# Altium PCB Vector_Mini_ST.PcbDoc (part 2 of 2)
Units mm, origin at the board's own origin, x right, y up, seen from the top; angles counter-clockwise.
Board outline 50 x 50 mm, 4 copper layers (Top Layer, Gnd, Power, Bottom Layer), stack 1.01 mm thick; 146 components, 103 nets, 533 pads, 310 vias.
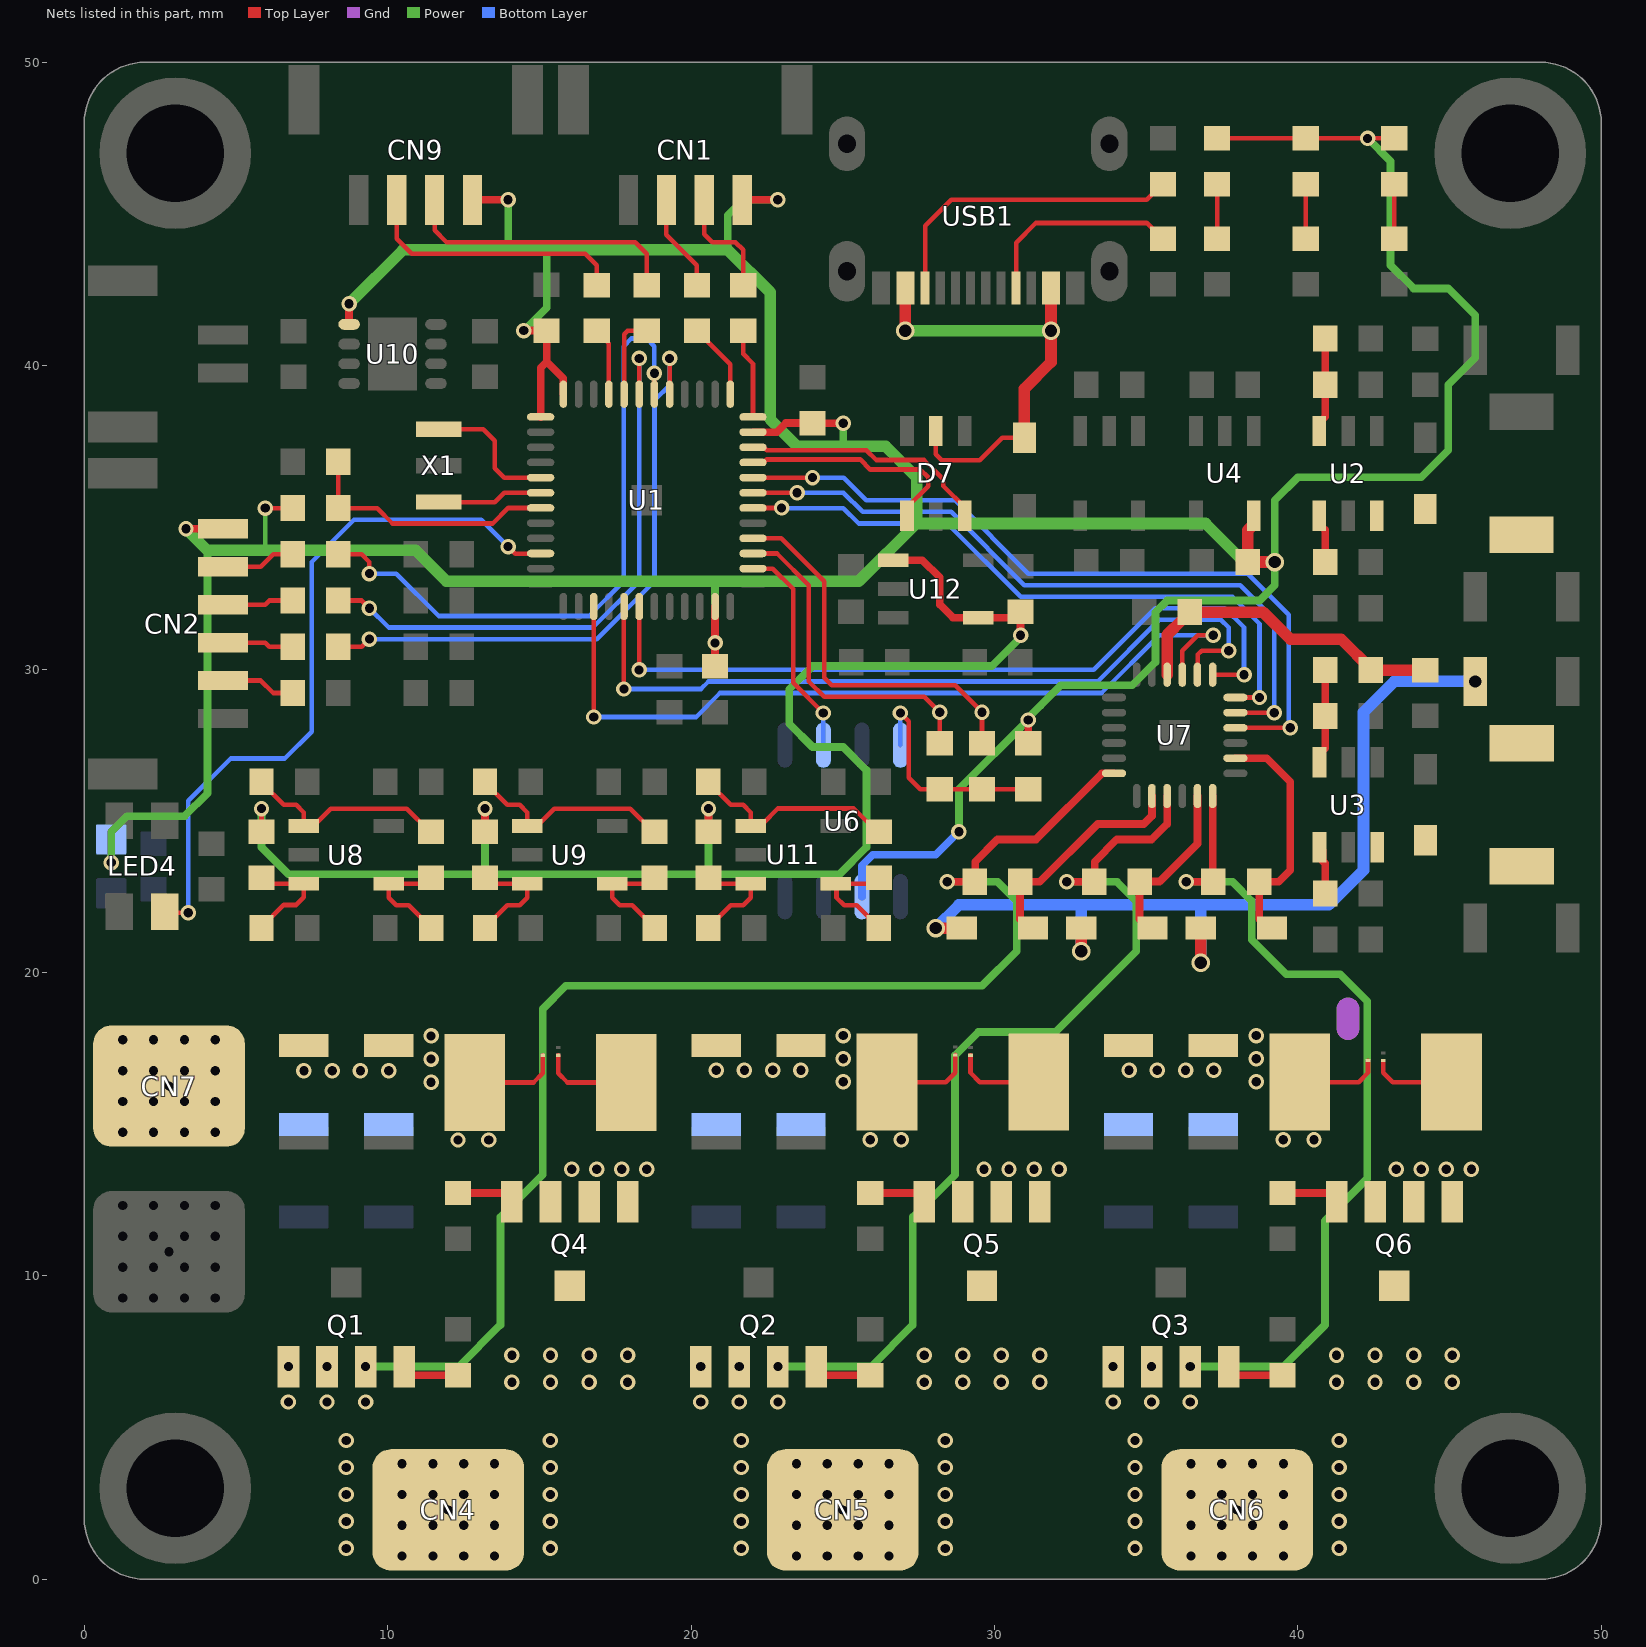
[diagram p4: the nets of this part, all layers, seen from the top]

## Via types
v1: diameter 0.508, hole 0.305, Top Layer to Bottom Layer, tented both sides, 297 vias
v2: diameter 0.61, hole 0.406, Top Layer to Bottom Layer, tented both sides, 12 vias
v3: diameter 1.5, hole 1, Top Layer to Bottom Layer, tented both sides, 1 vias

## Nets (pads, with @x,y where several pads share a name; then routed paths per layer and width w, separated by ;. In a path a pad name is that pad's centre, name@x,y a point inside that pad or via, vN(x,y) a via of type N, cw(c..) or ccw(c..) an arc to the next point about the centre after c; other vN are vias at no path point) (continued)
NetCN1_2: CN1.2 R11.2 | length 3.2
  Top Layer w0.152: CN1.2@19.187,45.466 19.187,44.313 20.193,43.307 R11.2@20.193,42.656
NetCN1_3: CN1.3 R12.2 | length 3.8
  Top Layer w0.152: CN1.3@20.437,45.466 20.437,44.333 20.701,44.069 21.463,44.069 21.717,43.815 R12.2@21.717,42.656
NetCN2_2: CN2.2 R13.2 | length 2.5
  Top Layer w0.152: CN2.2@4.572,29.621 5.812,29.621 6.223,29.21 R13.2@6.866,29.21
NetCN2_3: CN2.3 R14.2 | length 2.4
  Top Layer w0.152: CN2.3@4.572,30.871 5.959,30.871 6.096,30.734 R14.2@6.866,30.734
NetCN2_4: CN2.4 R15.2 | length 2.4
  Top Layer w0.152: CN2.4@4.572,32.121 5.959,32.121 6.096,32.258 R15.2@6.866,32.258
NetCN2_5: CN2.5 R16.2 | length 2.5
  Top Layer w0.152: CN2.5@4.572,33.371 5.812,33.371 6.223,33.782 R16.2@6.866,33.782
NetCN9_2: CN9.2 R46.2 | length 8.9
  Top Layer w0.152: CN9.2@10.297,45.466 10.297,44.186 10.795,43.688 16.51,43.688 16.891,43.307 R46.2@16.891,42.656
NetCN9_3: CN9.3 R49.2 | length 9.4
  Top Layer w0.152: CN9.3@11.547,45.466 11.547,44.46 11.938,44.069 18.161,44.069 18.542,43.688 R49.2@18.542,42.656
NetD1_1: D1.1 L1.1 U2.6
NetD2_1: D2.1 L2.1 U3.6
NetLED1_2: LED1.2 R7.1 | length 1.8
  Top Layer w0.152: R7.1@37.338,44.188 LED1.2@37.338,45.982
NetLED2_2: LED2.2 R8.1 | length 1.8
  Top Layer w0.152: R8.1@40.259,44.188 LED2.2@40.259,45.982
NetLED3_2: LED3.2 R9.1 | length 1.8
  Top Layer w0.152: R9.1@43.18,44.188 LED3.2@43.18,45.982
NetNT2_2: NT2.2 Q4.1 R26.2 | length 3
  Top Layer w0.152: NT2.2@15.621,17.272 15.621,16.678 15.927,16.372 R26.2@17.867,16.372
  other v1: 16.066,13.516 16.891,13.516 17.716,13.516 18.542,13.516
NetNT3_2: NT3.2 Q5.1 R27.2 | length 3
  Top Layer w0.152: NT3.2@29.21,17.272 29.21,16.689 29.516,16.383 R27.2@31.456,16.383
  other v1: 29.654,13.516 30.48,13.516 31.305,13.516 32.131,13.516
NetNT4_2: NT4.2 Q6.1 R28.2 | length 2.7
  Top Layer w0.152: 42.819,17.029 42.819,16.689 43.125,16.383 R28.2@45.065,16.383
  other v1: 43.243,13.516 44.069,13.516 44.895,13.516 45.72,13.516
NetQ1_2: Q1.2 R20.2 | length 1.9
  Top Layer w0.254: Q1.2@10.541,7.009 10.541,6.954 10.769,6.726 R20.2@12.319,6.726
NetQ2_2: Q2.2 R21.2 | length 1.9
  Top Layer w0.254: Q2.2@24.13,7.009 24.13,6.954 24.358,6.726 R21.2@25.908,6.726
NetQ3_2: Q3.2 R22.2 | length 1.9
  Top Layer w0.254: Q3.2@37.719,7.009 37.719,6.954 37.947,6.726 R22.2@39.497,6.726
NetQ4_2: Q4.2 R23.2 | length 1.9
  Top Layer w0.254: R23.2@12.319,12.731 13.869,12.731 14.097,12.503 Q4.2@14.097,12.447
NetQ5_2: Q5.2 R24.2 | length 1.9
  Top Layer w0.254: R24.2@25.908,12.73 27.458,12.73 27.686,12.502 Q5.2@27.686,12.447
NetQ6_2: Q6.2 R25.2 | length 1.9
  Top Layer w0.254: R25.2@39.497,12.73 41.047,12.73 41.275,12.502 Q6.2@41.275,12.447
NetR1_1: R1.1 R5.2 U2.3 | length 3.1
  Top Layer w0.254: U2.3@40.706,37.846 40.706,38.121 40.902,38.317 R5.2@40.902,39.37 R1.1@40.902,40.894
NetR2_1: R2.1 R6.2 U3.3 | length 3.1
  Top Layer w0.254: U3.3@40.714,26.924 40.714,27.199 40.902,27.387 R6.2@40.902,28.448 R2.1@40.902,29.972
NetR3_2: R3.2 U2.4 | length 1.6
  Top Layer w0.254: U2.4@40.706,35.052 40.706,34.777 40.902,34.581 R3.2@40.902,33.528
NetR4_2: R4.2 U3.4 | length 1.6
  Top Layer w0.254: U3.4@40.714,24.13 40.812,24.032 40.812,23.682 40.902,23.592 R4.2@40.902,22.606
NetR17_2: R17.2 R18.2 R19.1 U6.4 | length 7.4
  Top Layer w0.152: v1(26.901,28.552) 27.178,28.275 27.178,26.416 27.551,26.043 R17.2@28.194,26.043 R18.2@29.591,26.043 R19.1@31.115,26.043
  Bottom Layer w0.152: U6.4@26.901,27.496 v1(26.901,28.552)
NetR29_2: R29.2 USB1.10 | length 10.5
  Top Layer w0.152: USB1.10@27.714,42.561 27.714,44.605 28.575,45.466 35.016,45.466 R29.2@35.531,45.982
  Top Layer w0.254: R29.2@35.531,45.982 R29.2@35.56,45.982
NetR30_1: R30.1 R33.2 U8.4 | length 3.8
  Top Layer w0.152: U8.4@10.033,22.909 10.033,22.465 10.287,22.211 10.697,22.211 R33.2@11.43,21.477 ; U8.4@10.036,22.926 11.234,22.926 R30.1@11.43,23.122 ; R33.2@11.43,21.492 R33.2@11.459,21.463
NetR30_2: R30.2 R35.1 U8.1 | length 7
  Top Layer w0.152: R35.1@5.842,26.26 6.575,25.527 6.985,25.527 7.239,25.273 U8.1@7.239,24.829 ; U8.1@7.334,24.924 7.652,24.924 8.128,25.4 10.632,25.4 R30.2@11.401,24.63
  Top Layer w0.254: R35.1@5.842,26.26 R35.1@5.842,26.289 ; U8.1@7.239,24.829 U8.1@7.236,24.826 U8.1@7.334,24.924 ; R30.2@11.401,24.63 R30.2@11.43,24.63
NetR31_1: R31.1 R34.2 U9.4 | length 3.8
  Top Layer w0.152: U9.4@17.399,22.909 17.399,22.465 17.653,22.211 18.063,22.211 R34.2@18.796,21.477 ; U9.4@17.402,22.926 18.6,22.926 R31.1@18.796,23.122 ; R34.2@18.796,21.492 R34.2@18.825,21.463
NetR31_2: R31.2 R36.1 U9.1 | length 7
  Top Layer w0.152: R36.1@13.208,26.289 13.208,26.26 13.941,25.527 14.351,25.527 14.605,25.273 14.605,24.829 U9.1@14.602,24.826 14.7,24.924 15.018,24.924 15.494,25.4 17.998,25.4 18.767,24.63 R31.2@18.796,24.63
NetR37_2: R37.2 R41.2 U8.3 | length 3.8
  Top Layer w0.152: R37.2@5.842,21.463 5.842,21.492 6.575,22.225 6.985,22.225 7.239,22.479 7.239,22.923 U8.3@7.236,22.926 6.038,22.926 R41.2@5.842,23.122
NetR38_2: R38.2 R42.2 U9.3 | length 3.7
  Top Layer w0.152: R42.2@13.179,23.093 13.346,22.926 U9.3@14.602,22.926 ; R38.2@13.208,21.477 13.941,22.211 14.351,22.211 14.605,22.465 U9.3@14.605,22.909
NetR39_2: R39.2 USB1.4 | length 6.8
  Top Layer w0.152: USB1.4@30.714,42.561 30.714,44.049 31.369,44.704 35.016,44.704 35.531,44.188 R39.2@35.56,44.188
NetR43_1: R43.1 R44.2 U11.4 | length 3.8
  Top Layer w0.152: U11.4@24.768,22.926 25.995,22.926 R43.1@26.191,23.122 ; U11.4@24.794,22.909 24.794,22.465 25.048,22.211 25.458,22.211 R44.2@26.191,21.477
NetR43_2: R43.2 R47.1 U11.1 | length 7
  Top Layer w0.152: R47.1@20.574,26.289 20.574,26.26 21.307,25.527 21.717,25.527 21.971,25.273 U11.1@21.971,24.829 ; U11.1@21.968,24.826 U11.1@21.971,24.829 ; R43.2@26.133,24.63 R43.2@26.162,24.63 ; R43.2@26.136,24.633 25.367,25.403 22.863,25.403 22.384,24.924 22.066,24.924 U11.1@21.971,24.829
NetR48_2: R48.2 R50.2 U11.3 | length 3.7
  Top Layer w0.152: R48.2@20.574,21.477 21.307,22.211 21.717,22.211 21.971,22.465 U11.3@21.971,22.909 ; R50.2@20.574,23.122 20.77,22.926 U11.3@21.968,22.926
NRST: C18.2 R10.1 U1.7 | length 8.6
  Top Layer w0.152: C18.2@8.374,36.83 R10.1@8.374,35.306 9.652,35.306 10.16,34.798 13.462,34.798 13.974,35.31 U1.7@15.042,35.31
OSC_IN: U1.5 X1.3 | length 4.5
  Top Layer w0.152: X1.3@11.684,37.903 13.151,37.903 13.532,37.522 13.532,36.617 13.839,36.31 U1.5@15.042,36.31
OSC_OUT: U1.6 X1.1 | length 3.5
  Top Layer w0.152: X1.1@11.684,35.503 13.532,35.503 13.839,35.81 U1.6@15.042,35.81
PGND: C22.2 C23.2 C24.2 C25.2 C26.2 C27.2 C29.2 C30.2 C31.2 C32.2 C33.2 C34.2 CN7.1 NT1.2 NT5.2 NT6.2 NT7.2 R26.1 R27.1 R28.1 | length 9.3
  Top Layer w0.152: R26.1@12.867,16.372 14.807,16.372 15.113,16.678 NT5.2@15.113,17.272 ; R27.1@26.456,16.383 28.396,16.383 28.702,16.689 NT6.2@28.702,17.283 ; R28.1@40.065,16.383 42.005,16.383 42.311,16.689 NT7.2@42.311,17.093
  Gnd w0.762: 41.656,18.161 NT1.2@41.656,18.796
  other v1: 12.319,14.478 13.335,14.478 25.908,14.489 26.924,14.489 39.517,14.489 40.533,14.489 11.43,16.383 25.019,16.394 38.628,16.394 7.239,16.764 8.17,16.764 9.102,16.764 10.033,16.764 20.828,16.775 21.759,16.775 22.691,16.775 23.622,16.775 34.437,16.775 35.368,16.775 36.3,16.775 37.231,16.775 11.43,17.145 25.019,17.156 38.628,17.156 11.43,17.907 25.019,17.918 38.628,17.918
PWM_AH: U1.30 U7.24 | length 21.5
  Top Layer w0.152: U1.30@22.042,35.31 v1(22.983,35.31) ; U7.24@37.941,29.063 v1(38.735,29.063)
  Bottom Layer w0.152: v1(22.983,35.31) 22.987,35.306 25.019,35.306 25.527,34.798 28.448,34.798 30.861,32.385 37.846,32.385 38.735,31.496 v1(38.735,29.063)
PWM_AL: U1.15 U7.3 | length 27.2
  Top Layer w0.152: v1(16.792,28.42) U1.15@16.792,32.06 ; U7.3@36.191,29.813 36.191,30.603 36.703,31.115 v1(37.211,31.115)
  Bottom Layer w0.152: v1(16.792,28.42) 20.165,28.42 20.955,29.21 33.528,29.21 35.433,31.115 v1(37.211,31.115)
PWM_BH: U1.31 U7.23 | length 23.3
  Top Layer w0.152: U1.31@22.042,35.81 v1(23.495,35.81) ; U7.23@37.941,28.563 v1(39.223,28.563)
  Bottom Layer w0.152: v1(23.495,35.81) 25.023,35.81 25.654,35.179 28.575,35.179 30.988,32.766 38.1,32.766 39.223,31.643 v1(39.223,28.563)
PWM_BL: U1.17 U7.2 | length 26.2
  Top Layer w0.152: v1(17.786,29.343) 17.786,32.054 U1.17@17.792,32.06 ; U7.2@36.691,29.813 36.703,29.825 36.703,30.48 36.83,30.607 v1(37.719,30.607)
  Bottom Layer w0.152: v1(17.786,29.343) 20.326,29.343 20.574,29.591 33.401,29.591 35.433,31.623 37.465,31.623 37.719,31.369 v1(37.719,30.607)
PWM_CH: U1.32 U7.22 | length 25.1
  Top Layer w0.152: U1.32@22.042,36.31 v1(24.003,36.31) ; U7.22@37.941,28.063 37.943,28.065 v1(39.749,28.065)
  Bottom Layer w0.152: v1(24.003,36.31) 25.031,36.31 25.781,35.56 28.702,35.56 31.115,33.147 38.354,33.147 39.706,31.795 39.706,28.108 v1(39.749,28.065)
PWM_CL: U1.18 U7.1 | length 25.7
  Top Layer w0.152: v1(18.288,29.972) 18.29,29.974 18.29,32.058 U1.18@18.292,32.06 ; U7.1@37.191,29.813 v1(38.227,29.813)
  Bottom Layer w0.152: v1(18.288,29.972) 33.274,29.972 35.306,32.004 37.592,32.004 38.227,31.369 v1(38.227,29.813)
RGB_TIM: LED4.2 U1.10 | length 23.7
  Top Layer w0.152: LED4.2@2.655,21.995 2.679,21.971 v1(3.429,21.971) ; v1(13.97,34.036) 14.21,33.796 15.028,33.796 U1.10@15.042,33.81
  Bottom Layer w0.152: v1(3.429,21.971) 3.429,25.654 4.826,27.051 6.604,27.051 7.493,27.94 7.493,33.528 8.89,34.925 13.081,34.925 v1(13.97,34.036)
SH_A: C20.1 CN4.1 Q1.1 Q4.3 U7.12 | length 44
  Top Layer w0.254: v1(28.448,22.987) C20.1@29.345,22.987 29.366,23.008 29.366,23.651 30.099,24.384 31.369,24.384 33.548,26.563 U7.12@33.941,26.563
  Power w0.254: v1(9.272,7.009) 12.343,7.009 13.716,8.382 13.716,11.938 15.113,13.335 15.113,18.796 15.875,19.558 29.591,19.558 30.734,20.701 30.734,22.352 30.099,22.987 v1(28.448,22.987)
  other v1: 8.636,1.016 15.364,1.016 8.636,1.905 15.364,1.905 8.636,2.794 15.364,2.794 8.636,3.683 15.364,3.683 8.636,4.572 15.364,4.572 6.73,5.842 8.001,5.842 9.272,5.842 14.095,6.495 15.366,6.495 16.638,6.495 17.909,6.495 6.73,7.009 8.001,7.009 14.095,7.38 15.366,7.38 16.638,7.38 17.909,7.38
SH_B: C21.1 CN5.1 Q2.1 Q5.3 U7.15 | length 31.5
  Top Layer w0.254: v1(32.385,22.987) C21.1@33.282,22.987 33.303,23.008 33.303,23.651 34.036,24.384 35.179,24.384 35.691,24.896 U7.15@35.691,25.813
  Power w0.254: v1(22.863,7.009) 25.933,7.009 27.306,8.382 27.306,11.938 ; 27.305,11.938 28.702,13.335 28.702,17.272 29.464,18.034 32.004,18.034 34.671,20.701 34.671,22.352 34.036,22.987 v1(32.385,22.987)
  other v1: 21.654,1.016 28.382,1.016 21.654,1.905 28.382,1.905 21.654,2.794 28.382,2.794 21.654,3.683 28.382,3.683 21.654,4.572 28.382,4.572 20.32,5.842 21.591,5.842 22.863,5.842 27.684,6.495 28.955,6.495 30.227,6.495 31.498,6.495 20.32,7.009 21.591,7.009 27.684,7.38 28.955,7.38 30.227,7.38 31.498,7.38
SH_C: C28.1 CN6.1 Q3.1 Q6.3 U7.18 | length 28.3
  Top Layer w0.254: v1(36.322,22.987) C28.1@37.219,22.987 37.191,23.015 U7.18@37.191,25.813
  Power w0.254: v1(36.322,22.987) 37.846,22.987 38.481,22.352 38.481,21.082 39.624,19.939 41.402,19.939 42.291,19.05 42.291,13.208 40.894,11.811 40.894,8.381 39.522,7.009 v1(36.452,7.009)
  other v1: 34.632,1.016 41.36,1.016 34.632,1.905 41.36,1.905 34.632,2.794 41.36,2.794 34.632,3.683 41.36,3.683 34.632,4.572 41.36,4.572 33.909,5.842 35.18,5.842 36.452,5.842 41.273,6.495 42.544,6.495 43.816,6.495 45.087,6.495 33.909,7.009 35.18,7.009 41.273,7.38 42.544,7.38 43.816,7.38 45.087,7.38
SPI1_MISO: R16.1 U1.42 | length 21.5
  Top Layer w0.152: R16.1@8.374,33.782 9.144,33.782 9.398,33.528 v1(9.398,33.147) ; U1.42@18.792,39.06 v1(18.792,39.751)
  Bottom Layer w0.152: v1(9.398,33.147) 10.287,33.147 11.684,31.75 16.637,31.75 17.78,32.893 17.78,40.64 18.034,40.894 18.542,40.894 18.792,40.644 v1(18.792,39.751)
SPI1_MOSI: R15.1 U1.43 | length 19.4
  Top Layer w0.152: R15.1@8.374,32.258 9.144,32.258 v1(9.398,32.004) ; U1.43@18.292,39.06 v1(18.292,40.239)
  Bottom Layer w0.152: v1(9.398,32.004) 10.033,31.369 16.764,31.369 18.292,32.897 v1(18.292,40.239)
SPI1_SCK: R14.1 U1.41 | length 20
  Top Layer w0.152: R14.1@8.374,30.734 9.144,30.734 v1(9.398,30.988) ; U1.41@19.292,39.06 v1(19.292,40.239)
  Bottom Layer w0.152: v1(9.398,30.988) 16.891,30.988 18.796,32.893 18.796,38.862 19.292,39.358 v1(19.292,40.239)
SPI2_MISO: R17.1 U1.27 | length 11.2
  Top Layer w0.152: U1.27@22.042,33.81 22.832,33.81 23.876,32.766 23.876,29.591 24.384,29.083 27.686,29.083 v1(28.194,28.575) R17.1@28.194,27.551
SPI2_MOSI: R18.1 U1.28 | length 12.8
  Top Layer w0.152: U1.28@22.042,34.31 22.967,34.31 24.384,32.893 24.384,29.718 24.638,29.464 28.702,29.464 v1(29.591,28.575) R18.1@29.591,27.551
SPI2_SCK: U1.26 U6.2 | length 7.2
  Top Layer w0.152: U1.26@22.042,33.31 22.697,33.31 23.368,32.639 23.368,30.988 23.368,29.545 v1(24.361,28.552)
  Bottom Layer w0.152: U6.2@24.361,27.496 v1(24.361,28.552)
SWC: R11.1 U1.37 | length 2.6
  Top Layer w0.152: R11.1@20.193,41.148 20.222,41.148 20.549,40.821 20.549,40.792 21.292,40.049 U1.37@21.292,39.06
SWD: R12.1 U1.36 | length 3
  Top Layer w0.152: R12.1@21.717,41.148 21.717,40.386 22.042,40.061 U1.36@22.042,38.31
Uref_1.65: C42.2 R41.1 R42.1 R50.1 U12.1 U12.4 | length 50.2
  Top Layer w0.152: R41.1@5.842,24.63 v1(5.842,25.4)
  Top Layer w0.254: R42.1@13.208,24.63 v1(13.208,25.4) ; R50.1@20.574,24.63 v1(20.574,25.4) ; U12.1@26.667,33.589 27.625,33.589 28.194,33.02 28.194,32.131 28.636,31.689 U12.4@29.467,31.689 30.665,31.689 C42.2@30.861,31.885 v1(30.861,31.115)
  Power w0.254: v1(5.842,25.4) 5.842,24.13 6.731,23.241 13.208,23.241 ; v1(13.208,25.4) 13.208,23.241 ; v1(20.574,25.4) 20.574,23.241 ; v1(30.861,31.115) 30.861,31.046 29.914,30.099 24.003,30.099 23.241,29.337 23.241,28.194 24.003,27.432 25.019,27.432 25.781,26.67 25.781,24.13 24.892,23.241 20.574,23.241 ; 13.208,23.241 20.574,23.241
USART1_RX: R46.1 U1.45 | length 2.3
  Top Layer w0.152: R46.1@16.891,41.148 16.92,41.148 17.247,40.821 17.247,40.777 17.292,40.732 U1.45@17.292,39.06
USART1_TX: R49.1 U1.44 | length 2.8
  Top Layer w0.152: U1.44@17.792,39.06 17.792,41.033 17.907,41.148 R49.1@18.542,41.148
USB_FS_DM: D7.1 U1.33 | length 7.6
  Top Layer w0.152: U1.33@22.042,36.81 22.393,36.81 22.492,36.909 25.575,36.909 25.908,36.576 27.559,36.576 27.813,36.322 27.813,36.023 27.117,35.327 D7.1@27.117,35.052
USB_FS_DP: D7.3 U1.34 | length 8.2
  Top Layer w0.152: U1.34@22.042,37.31 22.393,37.31 22.492,37.211 25.781,37.211 26.101,36.891 27.678,36.891 28.309,36.259 28.309,36.035 29.017,35.327 D7.3@29.017,35.052
VB_A: C20.2 D3.1 U7.14 | length 7.5
  Top Layer w0.254: C20.2@30.845,22.995 30.845,21.765 D3.1@31.139,21.471 ; C20.2@30.853,22.987 31.496,22.987 33.401,24.892 34.925,24.892 35.191,25.158 U7.14@35.191,25.813
VB_B: C21.2 D4.1 U7.17 | length 5.6
  Top Layer w0.254: D4.1@35.076,21.471 34.782,21.765 34.782,22.995 35.441,22.995 36.691,24.245 U7.17@36.691,25.813
VB_C: C28.2 D5.1 U7.20 | length 8
  Top Layer w0.254: U7.20@37.941,27.063 38.977,27.063 39.751,26.289 39.751,23.368 39.37,22.987 C28.2@38.727,22.987 38.727,21.757 39.021,21.463 D5.1@39.146,21.463 D5.1@39.116,21.493
VCC_3.3: C10.1 C12.1 C13.1 C14.1 CN1.4 CN2.6 CN8.1 CN9.4 LED1.1 LED2.1 LED3.1 R10.2 R19.2 U1.1 U1.23 U1.35 U1.48 U4.5 U6.6 U10.5 | length 156.3
  Top Layer w0.152: v1(5.969,35.306) R10.2@6.866,35.306 ; LED1.1@37.338,47.49 LED2.1@40.259,47.49 v1(42.299,47.49) LED3.1@43.18,47.49
  Top Layer w0.254: v1(3.352,34.621) CN2.6@4.572,34.621 ; U10.5@8.727,41.361 v1(8.727,42.037) ; CN9.4@12.797,45.466 v1(13.97,45.466) ; v1(14.486,41.156) C14.1@15.24,41.156 15.24,40.132 ; U1.1@15.042,38.31 15.042,39.934 15.24,40.132 ; U1.48@15.792,39.06 15.792,39.58 15.24,40.132 ; C12.1@20.792,30.091 v1(20.792,30.861) U1.23@20.792,32.06 ; C12.1@20.828,30.091 C12.1@20.857,30.091 ; CN1.4@21.687,45.466 v1(22.86,45.466) ; U1.35@22.042,37.81 22.824,37.81 23.122,38.108 C13.1@23.876,38.108 ; C13.1@24.003,38.108 24.011,38.1 v1(25.019,38.1) ; R19.2@31.115,27.551 v1(31.115,28.321)
  Top Layer w0.381: U4.5@38.542,35.049 38.542,34.774 38.346,34.578 C10.1@38.346,33.528 v2(39.243,33.528)
  Power w0.152: 5.969,33.909 v1(5.969,35.306)
  Power w0.254: v1(0.889,23.622) 0.889,24.638 1.397,25.146 3.302,25.146 4.064,25.908 4.064,33.909 ; 13.97,43.815 v1(13.97,45.466) ; v1(14.486,41.156) 15.24,41.91 15.24,43.815 ; v1(20.792,30.861) 20.792,32.857 20.828,32.893 ; 21.209,43.815 21.209,44.958 21.717,45.466 v1(22.86,45.466) ; 24.956,37.338 25.019,37.401 v1(25.019,38.1) ; v1(28.829,24.638) 28.829,26.035 v1(31.115,28.321) 31.115,28.39 31.527,28.802 32.189,29.464 34.544,29.464 35.306,30.226 35.306,31.877 35.687,32.258 38.735,32.258 39.243,32.766 v2(39.243,33.528) 39.243,35.56 40.005,36.322 44.069,36.322 44.958,37.211 44.958,39.37 45.847,40.259 45.847,41.656 44.958,42.545 43.815,42.545 43.053,43.307 43.053,46.736 v1(42.299,47.49)
  Power w0.381: v1(3.352,34.621) 4.064,33.909 5.969,33.909 10.922,33.909 11.938,32.893 20.828,32.893 25.527,32.893 27.432,34.798 ; v1(8.727,42.037) 10.505,43.815 13.97,43.815 15.24,43.815 21.209,43.815 22.606,42.418 22.606,38.227 23.495,37.338 24.956,37.338 26.416,37.338 27.432,36.322 27.432,34.798 ; v2(39.243,33.528) 38.227,33.528 36.957,34.798 27.432,34.798
  Bottom Layer w0.254: v1(0.889,23.622) CN8.1@0.889,24.384 ; U6.6@25.631,22.496 25.631,23.518 25.989,23.876 28.067,23.876 v1(28.829,24.638)
VCC_12: C7.1 C8.1 C19.1 D3.2 D4.2 D5.2 L2.2 R2.2 U7.4 | length 41.4
  Top Layer w0.381: v2(28.067,21.463) D3.2@28.926,21.463 ; v2(32.863,20.701) D4.2@32.863,21.463 ; U7.4@35.691,29.813 35.691,31.127 36.199,31.635 36.228,31.635 36.441,31.848 C19.1@36.441,31.877 38.862,31.877 39.751,30.988 41.423,30.988 42.418,29.993 42.418,29.964 C8.1@44.196,29.964 ; v2(36.8,20.32) D5.2@36.8,21.463
  Bottom Layer w0.381: v2(28.067,21.463) 28.829,22.225 32.829,22.225 ; v2(32.863,20.701) 32.863,22.191 32.829,22.225 ; v2(36.8,20.32) 36.8,22.195 36.83,22.225 ; v2(45.847,29.591) 43.18,29.591 42.164,28.575 42.164,23.368 41.021,22.225 36.83,22.225 ; 32.829,22.225 36.83,22.225
VUSB: D6.2 D7.5 USB1.2 USB1.11 | length 15.6
  Top Layer w0.152: D7.5@28.067,37.846 28.067,37.074 28.259,36.882 29.516,36.882 30.256,37.622 D6.2@30.988,37.622
  Top Layer w0.381: v2(27.064,41.148) USB1.11@27.064,42.561 ; D6.2@30.988,37.622 30.988,39.243 31.864,40.119 v2(31.864,41.148) USB1.2@31.864,42.561
  Power w0.381: v2(27.064,41.148) v2(31.864,41.148)
pads on no net: CN1.0 CN2.0 CN9.0 CN11.0 LED4.4 U1.2 U1.3 U1.4 U1.8 U1.9 U1.19 U1.22 U1.24 U1.29 U2.1 U3.1 U4.4 U5.4 U6.1 U6.5 U6.8 U7.5 U7.7 U7.8 U7.21 USB1.3 USB1.9

## Polygon pours and split planes (outlines as drawn)
SH_A on Top Layer "SH_A_L01_P057" (solid, remove dead copper, pour order 57): 6.223,7.62 6.477,7.874 9.525,7.874 9.779,7.62 9.779,5.715 10.16,5.334 13.081,5.334 13.462,5.715 13.462,10.381 14.003,10.922 18.001,10.922 18.542,10.381 18.542,0.762 18.034,0.254 6.731,0.254 6.223,0.762
SH_B on Top Layer "SH_B_L01_P004" (solid, remove dead copper, pour order 4): 19.812,7.62 20.066,7.874 23.114,7.874 23.368,7.62 23.368,5.715 23.749,5.334 26.67,5.334 27.051,5.715 27.051,10.381 27.592,10.922 31.59,10.922 32.131,10.381 32.131,0.762 31.623,0.254 20.32,0.254 19.812,0.762
SH_C on Top Layer "SH_C_L01_P006" (solid, remove dead copper, pour order 6): 33.655,7.874 33.401,7.62 33.401,0.762 33.909,0.254 42.926,0.254 43.434,0.762 43.434,5.207 43.942,5.715 45.212,5.715 45.72,6.223 45.72,10.381 45.179,10.922 41.181,10.922 40.64,10.381 40.64,5.715 40.259,5.334 37.338,5.334 36.957,5.715 36.957,7.62 36.703,7.874
NetD1_1 on Top Layer "NETD1_1_L01_P034" (solid, remove dead copper, pour order 34): 42.283,34.544 42.283,35.687 42.41,35.814 44.696,35.814 45.458,35.052 48.506,35.052 48.633,34.925 48.633,33.909 48.506,33.782 44.061,33.782 43.426,34.417 42.41,34.417
DCBUS on Top Layer "DCBUS_L01_P033" (solid, remove dead copper, pour order 33): 42.037,31.369 41.91,31.496 41.91,33.655 41.418,34.147 41.418,35.687 41.91,35.687 41.91,34.544 42.418,34.036 43.18,34.036 43.815,33.401 46.228,33.401 46.355,33.274 46.355,31.496 46.228,31.369
5V on Top Layer "5V_L01_P032" (solid, remove dead copper, pour order 32): 43.68,40.259 43.553,40.386 43.553,41.402 43.68,41.529 46.982,41.529 47.109,41.402 47.109,39.37 47.236,39.243 48.506,39.243 48.633,39.116 48.633,37.973 48.506,37.846 46.347,37.846 46.22,37.973 46.22,39.37 46.093,39.497 45.331,39.497 45.204,39.624 45.204,40.132 45.077,40.259
GND on Top Layer "GND_L01_P031" (solid, remove dead copper, pour order 31): 41.275,36.949 41.275,38.352 41.402,38.479 41.656,38.479 41.775,38.598 41.775,39.878 41.902,40.005 44.569,40.005 44.704,39.87 44.704,36.965 44.442,36.703 41.521,36.703
VCC_12 on Top Layer "VCC_12_L01_P030" (solid, remove dead copper, pour order 30): 43.688,29.337 43.561,29.464 43.561,30.48 43.688,30.607 46.99,30.607 47.117,30.48 47.117,28.448 47.244,28.321 48.514,28.321 48.641,28.194 48.641,27.051 48.514,26.924 46.355,26.924 46.228,27.051 46.228,28.448 46.101,28.575 45.339,28.575 45.212,28.702 45.212,29.21 45.085,29.337
GND on Top Layer "GND_L01_P028" (solid, remove dead copper, pour order 28): 41.283,26.027 41.283,27.43 41.41,27.557 41.664,27.557 41.783,27.676 41.783,28.956 41.91,29.083 44.577,29.083 44.712,28.948 44.712,26.043 44.45,25.781 41.529,25.781
DCBUS on Top Layer "DCBUS_L01_P021" (solid, remove dead copper, pour order 21): 42.037,20.447 41.91,20.574 41.91,22.733 41.418,23.225 41.418,24.765 41.91,24.765 41.91,23.622 42.418,23.114 43.18,23.114 43.815,22.479 46.228,22.479 46.355,22.352 46.355,20.574 46.228,20.447
NetD2_1 on Top Layer "NETD2_1_L01_P023" (solid, remove dead copper, pour order 23): 42.291,23.622 42.291,24.765 42.418,24.892 44.704,24.892 45.466,24.13 48.514,24.13 48.641,24.003 48.641,22.987 48.514,22.86 44.069,22.86 43.434,23.495 42.418,23.495
NetNT4_2 on Top Layer "NETNT4_2_L01_P020" (solid, remove dead copper, pour order 20): 42.291,11.557 42.037,11.811 42.037,13.843 42.291,14.097 43.688,14.097 44.042,14.451 44.042,17.975 44.355,18.288 45.732,18.288 46.046,17.973 46.046,11.883 45.72,11.557
NetNT3_2 on Top Layer "NETNT3_2_L01_P019" (solid, remove dead copper, pour order 19): 28.702,11.557 28.448,11.811 28.448,13.843 28.702,14.097 30.099,14.097 30.453,14.451 30.453,17.975 30.766,18.288 32.143,18.288 32.457,17.973 32.457,11.883 32.131,11.557
NetNT2_2 on Top Layer "NETNT2_2_L01_P007" (solid, remove dead copper, pour order 7): 15.113,11.557 14.859,11.811 14.859,13.843 15.113,14.097 16.51,14.097 16.864,14.451 16.864,17.975 17.177,18.288 18.554,18.288 18.868,17.973 18.868,11.883 18.542,11.557
PGND on Top Layer "Top Layer-PGND" (solid, remove dead copper, pour order 16): 11.303,15.875 11.684,15.494 11.684,14.478 12.065,14.097 13.462,14.097 13.866,14.501 13.866,17.972 13.55,18.288 0.635,18.288 0.254,17.907 0.254,14.605 0.635,14.224 5.08,14.224 5.461,14.605 5.461,15.494 5.842,15.875
DCBUS on Top Layer "DCBUS_L01_P000" (solid, remove dead copper, pour order 0): 0.254,8.89 0.254,12.446 0.635,12.827 5.842,12.827 6.096,13.081 6.096,14.605 6.477,14.986 10.795,14.986 11.176,14.605 11.176,9.075 10.61,8.509 0.635,8.509
PGND on Top Layer "PGND_L01_P014" (solid, remove dead copper, pour order 14): 41.064,17.983 40.748,18.299 33.675,18.299 33.294,17.918 33.294,16.267 33.675,15.886 38.501,15.886 38.882,15.505 38.882,14.489 39.263,14.108 40.66,14.108 41.064,14.512
PGND on Top Layer "PGND_L01_P013" (solid, remove dead copper, pour order 13): 27.455,17.983 27.139,18.299 20.066,18.299 19.685,17.918 19.685,16.267 20.066,15.886 24.892,15.886 25.273,15.505 25.273,14.489 25.654,14.108 27.051,14.108 27.455,14.512
DCBUS on Top Layer "DCBUS_L01_P002" (solid, remove dead copper, pour order 2): 33.655,14.986 33.274,14.605 33.274,9.017 33.655,8.636 37.973,8.636 38.354,9.017 38.354,14.605 37.973,14.986
DCBUS on Top Layer "DCBUS_L01_P001" (solid, remove dead copper, pour order 1): 20.066,14.986 19.685,14.605 19.685,9.017 20.066,8.636 24.384,8.636 24.765,9.017 24.765,14.605 24.384,14.986
SH_C on Bottom Layer "NONET_L-01_P-001" (solid, remove dead copper, pour order 64): 33.401,7.62 33.655,7.874 45.466,7.874 45.72,7.62 45.72,6.223 45.212,5.715 43.942,5.715 43.434,5.207 43.434,0.762 42.926,0.254 33.909,0.254 33.401,0.762
SH_B on Bottom Layer "NONET_L-01_P-001" (solid, remove dead copper, pour order 63): 19.812,7.62 20.066,7.874 31.75,7.874 32.131,7.493 32.131,0.762 31.623,0.254 20.32,0.254 19.812,0.762
SH_A on Bottom Layer "SH_A_L04_P003" (solid, remove dead copper, pour order 3): 6.223,7.62 6.477,7.874 18.288,7.874 18.542,7.62 18.542,0.762 18.034,0.254 6.731,0.254 6.223,0.762
GND on Bottom Layer "GND_L04_P053" (solid, remove dead copper, pour order 53): 0,19.939 50.038,19.939 50.038,49.911 0,49.911
DCBUS on Bottom Layer "DCBUS_L04_P017" (solid, remove dead copper, pour order 17): 0.254,12.446 0.635,12.827 47.879,12.827 48.26,12.446 48.26,8.89 47.879,8.509 0.635,8.509 0.254,8.89
PGND on Bottom Layer "PGND_L04_P018" (solid, remove dead copper, pour order 18): 0.254,18.161 0.635,18.542 47.879,18.542 48.26,18.161 48.26,14.605 47.879,14.224 0.635,14.224 0.254,14.605
SH_A on Power "SH_A_L03_P058" (solid, remove dead copper, pour order 58): 15.702,5.334 16.21,4.826 16.21,0.762 15.702,0.254 8.336,0.254 7.828,0.762 7.828,4.826 8.336,5.334
GND on Power "GND_L03_P050" (solid, remove dead copper, pour order 50): 0,19.939 50.038,19.939 50.038,49.911 0,49.911
SH_C on Power "SH_C_L03_P056" (solid, remove dead copper, pour order 56): 41.68,5.334 42.188,4.826 42.188,0.762 41.68,0.254 34.314,0.254 33.806,0.762 33.806,4.826 34.314,5.334
SH_B on Power "SH_B_L03_P055" (solid, remove dead copper, pour order 55): 28.702,5.334 29.21,4.826 29.21,0.762 28.702,0.254 21.336,0.254 20.828,0.762 20.828,4.826 21.336,5.334
DCBUS on Power "DCBUS_L03_P035" (solid, remove dead copper, pour order 35): 44.069,33.528 43.815,33.274 43.815,20.447 46.482,17.78 46.482,10.033 46.736,9.779 47.879,9.779 48.133,10.033 48.133,18.542 45.339,21.336 45.339,33.274 45.085,33.528
NetNT4_2 on Power "NETNT4_2_L03_P041" (solid, remove dead copper, pour order 41): 43.18,14.351 42.799,13.97 42.799,11.938 43.18,11.557 45.72,11.557 46.046,11.883 46.039,11.891 46.039,13.905 45.593,14.351
NetNT3_2 on Power "NETNT3_2_L03_P040" (solid, remove dead copper, pour order 40): 29.591,14.351 29.21,13.97 29.21,11.938 29.591,11.557 32.131,11.557 32.457,11.883 32.45,11.891 32.45,13.905 32.004,14.351
NetNT2_2 on Power "NETNT2_2_L03_P039" (solid, remove dead copper, pour order 39): 16.002,14.351 15.621,13.97 15.621,11.938 16.002,11.557 18.542,11.557 18.868,11.883 18.861,11.891 18.861,13.905 18.415,14.351
SH_A on Gnd "SH_A_L02_P062" (solid, remove dead copper, pour order 62): 6.223,7.62 6.477,7.874 9.525,7.874 9.779,7.62 9.779,5.715 10.16,5.334 13.081,5.334 13.462,5.715 13.462,7.62 13.716,7.874 18.288,7.874 18.542,7.62 18.542,0.762 18.034,0.254 6.731,0.254 6.223,0.762
SH_C on Gnd "NONET_L-01_P-001" (solid, remove dead copper, pour order 61): 33.401,7.62 33.655,7.874 36.703,7.874 36.957,7.62 36.957,5.715 37.338,5.334 40.259,5.334 40.64,5.715 40.64,7.493 41.021,7.874 45.466,7.874 45.72,7.62 45.72,6.223 45.212,5.715 43.942,5.715 43.434,5.207 43.434,0.762 42.926,0.254 33.909,0.254 33.401,0.762
SH_B on Gnd "NONET_L-01_P-001" (solid, remove dead copper, pour order 60): 19.812,7.62 20.066,7.874 23.114,7.874 23.368,7.62 23.368,5.715 23.749,5.334 26.67,5.334 27.051,5.715 27.051,7.493 27.432,7.874 31.75,7.874 32.131,7.493 32.131,0.762 31.623,0.254 20.32,0.254 19.812,0.762
GND on Gnd "GND_L02_P036" (solid, remove dead copper, pour order 36): 0,19.939 50.038,19.939 50.038,49.911 0,49.911
PGND on Gnd "PGND_L02_P042" (solid, remove dead copper, pour order 42): 0,18.542 50.038,18.542 50.038,14.224 0,14.224
DCBUS on Gnd "DCBUS_L02_P043" (solid, remove dead copper, pour order 43): 0,8.509 50.038,8.509 50.038,12.827 0,12.827

## Silkscreen, mask and mechanical layers (free items; w line width, h text height)
Top Overlay:
  region: 3.607,7.076 3.607,6.417 2.921,6.417 2.921,7.076
  region: 3.607,7.418 3.607,8.076 2.921,8.076 2.921,7.418
  region: 1.946,7.076 1.946,6.417 2.631,6.417 2.631,7.076
  region: 1.946,7.418 1.946,8.076 2.631,8.076 2.631,7.418
  region: 1.984,18.923 1.984,20.701 2.67,20.701 2.67,18.923
  region: 3.645,18.923 3.645,20.701 2.959,20.701 2.959,18.923
  lines w0.203: 6.168,40.005 6.168,38.735 7.62,38.735 7.62,40.005 ; 6.168,40.767 6.168,42.037 7.62,42.037 7.62,40.767
  lines w0.381: 1.76,6.231 1.76,8.263 3.792,8.263 3.792,6.231 1.76,6.231 ; 1.798,18.796 1.798,20.828 3.83,20.828 3.83,18.796 1.798,18.796
  text "PWR" at 36.579,48.641 h1.14
  text "RUN" at 39.507,48.652 h1.14
  text "ERR" at 42.432,48.641 h1.14
  text "-8MHz-" at 9.309,39.127 h1.14 r270
Bottom Overlay:
  drawing of 45 lines, arcs and shapes, not listed
  text "G" at 8.109,48.203 h1.14
  text "RX" at 10.282,48.214 h1.14
  text "TX" at 12.58,48.214 h1.14
  text "V" at 14.238,48.214 h1.14
  text "G" at 16.999,48.203 h1.14
  text "SWC" at 19.42,48.203 h1.14
  text "SWD" at 21.723,48.203 h1.14
  text "V" at 23.128,48.214 h1.14
  text "UART" at 12.299,44.297 h1.52
  text "SWD" at 20.836,44.297 h1.52
  text "USB" at 30.484,44.297 h1.52
  text "CL" at 1.772,42.361 h1.14
  text "CAN" at 6.988,39.971 h1.52
  text "CH" at 1.772,37.789 h1.14
  text "V" at 1.772,34.36 h1.14
  text "MI" at 1.772,33.132 h1.14
  text "MO" at 1.772,31.883 h1.14
  text "SPI" at 6.988,31.082 h1.52
  text "CK" at 1.772,30.636 h1.14
  text "CS" at 1.772,29.387 h1.14
  text "G" at 1.772,28.137 h1.14
  text "NTC" at 6.988,23.08 h1.52
  text "A" at 13.27,4.953 h3.05
  text "B" at 26.288,4.953 h3.05
  text "C" at 39.266,4.905 h3.05
Bottom Solder:
  region: 6.972,9.652 ccw(c6.972,9.08) 6.972,8.509 44.691,8.509 ccw(c44.691,9.081) 44.691,9.652
  region: 6.972,18.542 ccw(c6.972,17.971) 6.972,17.399 44.691,17.399 ccw(c44.691,17.971) 44.691,18.542
Mechanical 1:
  the board outline again, w0.254